# Altium PCB 载板V2.PcbDoc (part 2 of 2)
Units mil, origin at the board's own origin, x right, y up, seen from the top; angles counter-clockwise.
Board outline 2583.5 x 2223.97 mil, 4 copper layers (Top Layer, Mid-Layer 1, Mid-Layer 2, Bottom Layer); 78 components, 78 nets, 323 pads, 130 vias.
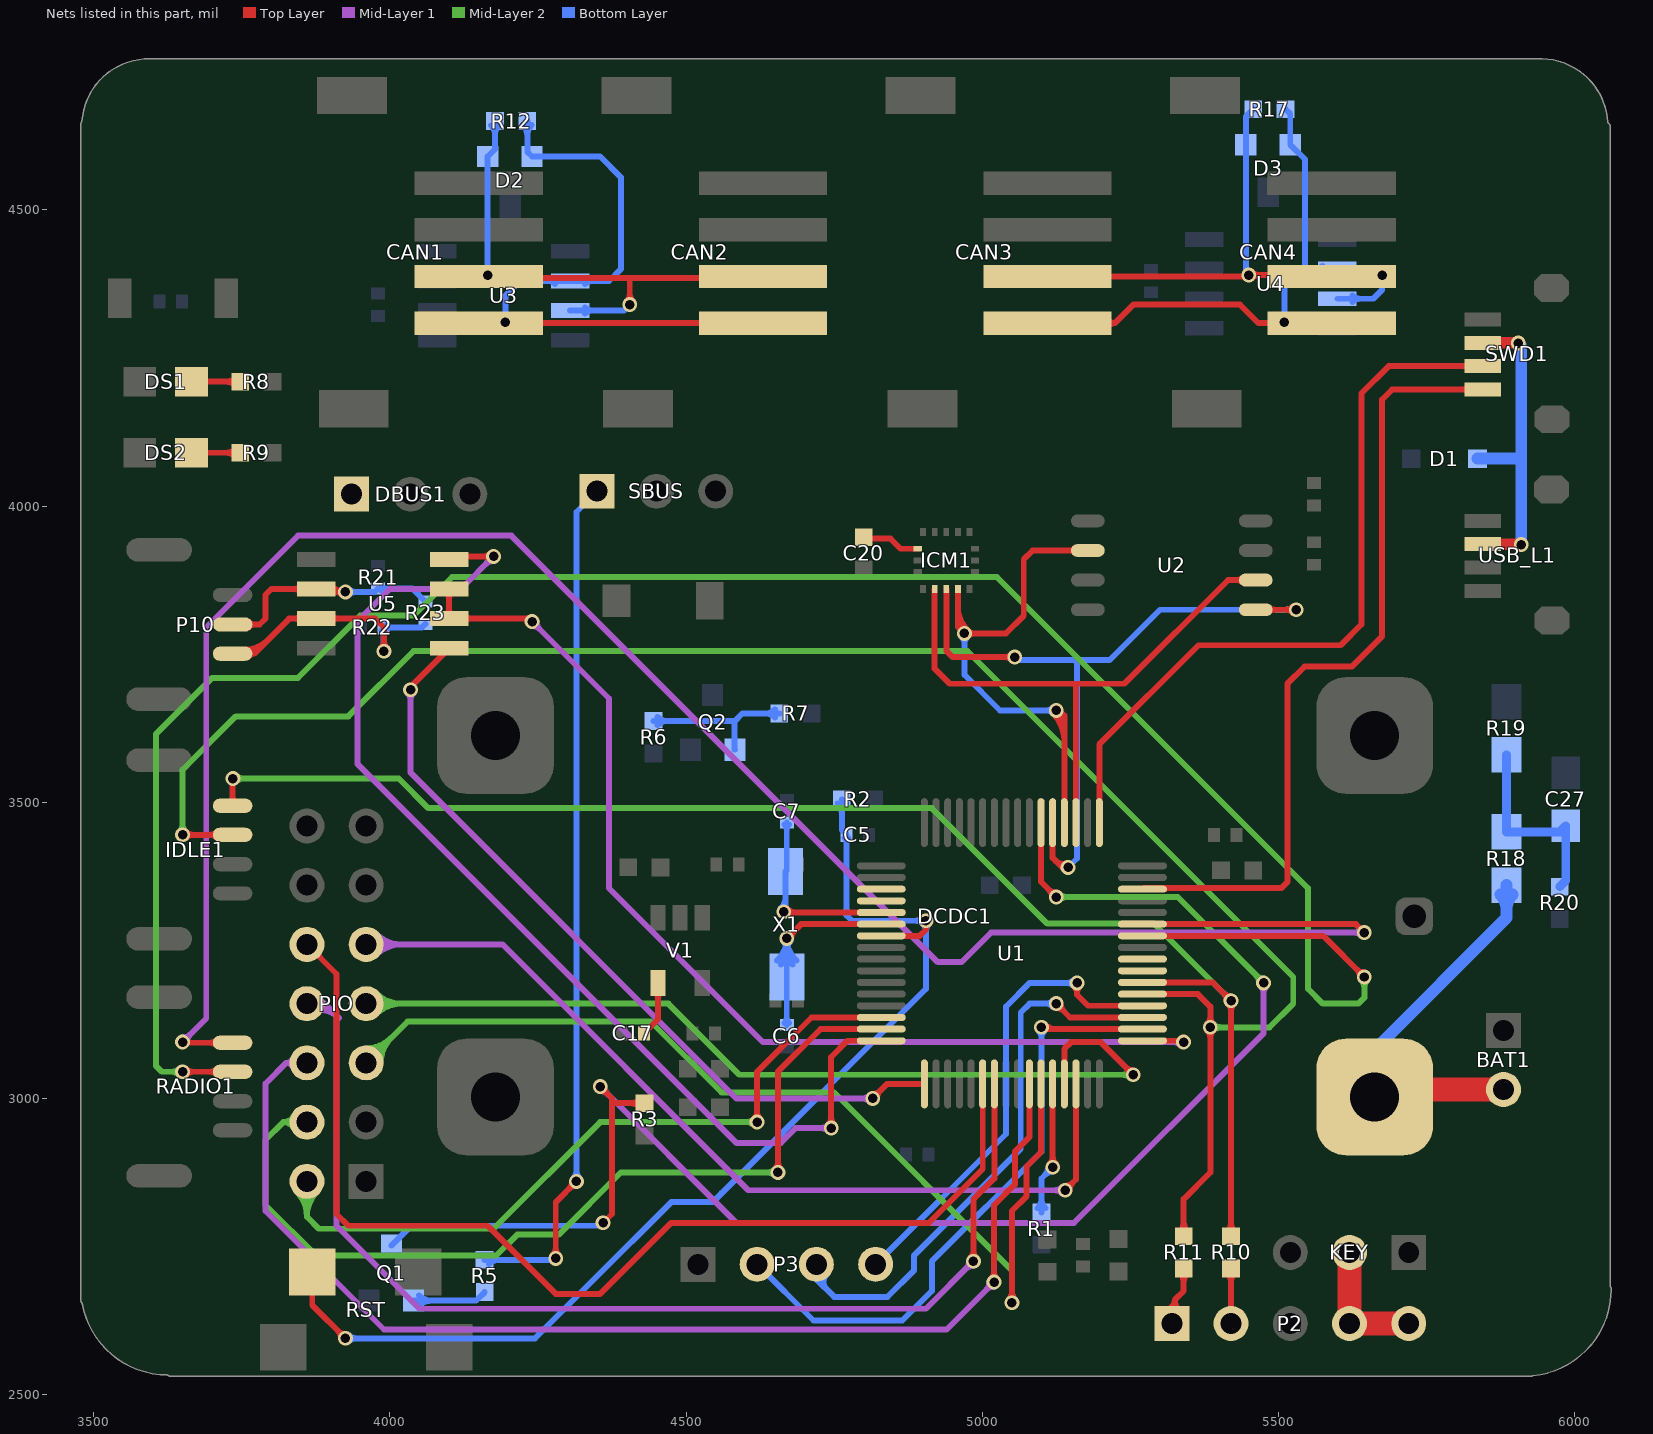
[diagram p4: the nets of this part, all layers, seen from the top]

## Via types
v1: diameter 25, hole 16, Top Layer to Bottom Layer, 124 vias
v2: diameter 244.09, hole 108.27, Top Layer to Bottom Layer, 6 vias

## Nets (pads, with @x,y where several pads share a name; then routed paths per layer and width w, separated by ;. In a path a pad name is that pad's centre, name@x,y a point inside that pad or via, vN(x,y) a via of type N, cw(c..) or ccw(c..) an arc to the next point about the centre after c; other vN are vias at no path point) (continued)
NetC5_2: C5.2 R2.1 RST.1 U1.7 | length 2077.1
  Top Layer w10: RST.1@3869,2707 3869,2651 v1(3925,2595) ; v1@3917.5,2595 ccw(c3899.39,2595) 3912.2,2607.8 ccw(c3925,2620.61) v1@3925,2602.5 ; U1.7@4829.53,3274.53 4894.53,3274.53 4905,3285 v1(4905,3300)
  Bottom Layer w10: v1(3925,2595) 4245,2595 4405,2755 4410,2760 4475,2825 4545,2825 4560,2840 4905,3185 v1(4905,3300) 4780,3300 4771,3309 C5.2@4771,3445 4763,3453 R2.1@4763,3505 ; v1@3930.3,2589.7 cw(c3943.11,2576.89) 3943.11,2595 cw(c3943.11,2613.11) v1@3930.3,2600.3 ; R2.1@4755.93,3497.93 cw(c4738.86,3480.86) 4763,3480.86 cw(c4787.14,3480.86) R2.1@4770.07,3497.93 ; C5.2@4767.46,3439.65 cw(c4758.93,3431.12) 4771,3431.12 cw(c4783.07,3431.12) C5.2@4774.54,3439.65 ; v1@4899.7,3305.3 cw(c4886.89,3318.11) 4886.89,3300 cw(c4886.89,3281.89) 4899.7,3294.7 cw(c4886.89,3281.89) 4905,3281.89 cw(c4923.11,3281.89) v1@4910.3,3294.7
NetC6_2: C6.2 U1.6 X1.1 | length 524
  Top Layer w10: v1(4670,3270) 4694.21,3294.21 U1.6@4829.53,3294.21 ; v1@4670,3277.5 ccw(c4670,3295.61) 4682.8,3282.8 ccw(c4695.61,3270) v1@4677.5,3270
  Bottom Layer w10: X1.1@4653.57,3233.06 ccw(c4620.25,3270) v1(4670,3270) ; X1.1@4660.27,3225.63 ccw(c4640.53,3247.51) 4670,3247.51 ccw(c4699.47,3247.51) X1.1@4679.73,3225.63 ; v1@4664.7,3264.7 cw(c4651.89,3251.89) 4670,3251.89 cw(c4688.11,3251.89) v1@4675.3,3264.7 ; C6.2@4666.46,3127.54 ccw(c4657.93,3136.07) 4670,3136.07 ccw(c4682.07,3136.07) C6.2@4673.54,3127.54 ; C6.2@4670,3124 X1.1@4670,3205 v1(4670,3270) ; X1.1@4686.43,3233.06 cw(c4719.75,3270) v1(4670,3270)
NetC7_2: C7.2 U1.5 X1.2 | length 387.7
  Top Layer w10: v1(4665,3315) 4670,3315 4671.1,3313.9 4686.1,3313.9 4710,3313.9 U1.5@4829.53,3313.9 ; v1@4670.3,3309.7 cw(c4680.45,3299.55) 4680.45,3313.9 ; v1@4670.3,3320.3 ccw(c4685.77,3335.77) 4685.77,3313.9
  Bottom Layer w10: v1@4659.7,3320.3 ccw(c4639.65,3340.35) 4668,3340.35 ; v1(4665,3315) 4668,3318 X1.2@4668,3383 4670,3385 C7.2@4670,3466 ; C7.2@4666.46,3462.46 cw(c4657.93,3453.93) 4670,3453.93 cw(c4682.07,3453.93) C7.2@4673.54,3462.46
NetC17_1: C17.1 V1.4 | length 124.2
  Top Layer w10: C17.1@4429,3110 4452.6,3133.6 V1.4@4452.6,3194.88 ; V1.4@4447.09,3180.51 cw(c4433.78,3167.2) 4452.6,3167.2 cw(c4471.42,3167.2) V1.4@4458.11,3180.51
NetC20_2: C20.2 ICM1.14 | length 99.2
  Top Layer w10: C20.2@4800.06,3947.5 4802.56,3945 4845,3945 4862.09,3927.91 ICM1.14@4891.14,3927.91
NetC27_1: C27.1 R18.1 R19.2 R20.2 | length 340.8
  Bottom Layer w15: R19.2@5885,3580 R18.1@5885,3450 5975,3450 C27.1@5985,3460 5985,3367.56 R20.2@5974.94,3357.5
NetCAN1_3: CAN1.3 CAN2.3 D2.1 R12.2 U3.7 | length 1028.7
  Top Layer w10: CAN1.3@4150,4387.52 4152.52,4385 4410,4385 4627.48,4385 CAN2.3@4630,4387.52 ; CAN1.3@4170.3,4395.3 ccw(c4195.18,4420.18) CAN1.3@4195.18,4385 ; v1@4399.7,4345.3 ccw(c4386.89,4358.11) 4405,4358.11 ccw(c4423.11,4358.11) v1@4410.3,4345.3 ; v1(4405,4340) 4405,4380
  Bottom Layer w10: v1@4159.7,4395.3 ccw(c4146.89,4408.11) 4165,4408.11 ccw(c4183.11,4408.11) v1@4170.3,4395.3 ; v1(4165,4390) D2.1@4165,4590 4177.5,4602.5 R12.2@4177.5,4649.94 ; R12.2@4170.43,4642.86 cw(c4153.36,4625.79) 4177.5,4625.79 cw(c4201.64,4625.79) R12.2@4184.57,4642.86 ; U3.7@4304.41,4330 4395,4330 ; U3.7@4329.71,4324.7 cw(c4342.52,4311.89) 4342.52,4330 cw(c4342.52,4348.11) U3.7@4329.71,4335.3
NetCAN1_4: CAN1.4 CAN2.4 D2.2 R12.1 U3.6 | length 1301.6
  Top Layer w10: CAN1.4@4150,4308.78 CAN2.4@4630,4308.78 ; CAN1.4@4173.95,4308.78 ccw(c4173.95,4331.05) CAN1.4@4189.7,4315.3 ; CAN1.4@4179.84,4308.78 cw(c4179.84,4294.84) CAN1.4@4189.7,4304.7 ; CAN1.4@4200.3,4304.7 cw(c4210.16,4294.84) CAN1.4@4210.16,4308.78 ; CAN1.4@4200.3,4315.3 ccw(c4216.05,4331.05) CAN1.4@4216.05,4308.78
  Bottom Layer w10: v1@4189.7,4315.3 ccw(c4176.89,4328.11) 4195,4328.11 ccw(c4213.11,4328.11) v1@4200.3,4315.3 ; v1(4195,4310) 4195,4355 4220,4380 U3.6@4304.41,4380 4370,4380 4390,4400 4390,4555 4355,4590 D2.2@4240,4590 4232,4598 R12.1@4232,4650 ; R12.1@4224.93,4642.93 cw(c4207.86,4625.86) 4232,4625.86 cw(c4256.14,4625.86) R12.1@4239.07,4642.93 ; U3.6@4279.11,4374.7 ccw(c4266.3,4361.89) 4266.3,4380 ccw(c4266.3,4398.11) U3.6@4279.11,4385.3 ; U3.6@4329.71,4374.7 cw(c4342.52,4361.89) 4342.52,4380 cw(c4342.52,4398.11) U3.6@4329.71,4385.3
NetCAN3_3: CAN3.3 CAN4.3 D3.1 R17.2 U4.7 | length 971.4
  Top Layer w10: CAN3.3@5110,4387.52 5447.52,4387.52 v1(5450,4390) 5587.52,4390 CAN4.3@5590,4387.52 ; v1@5455.3,4384.7 cw(c5468.11,4371.89) 5468.11,4390 cw(c5468.11,4408.11) v1@5455.3,4395.3
  Bottom Layer w10: v1(5450,4390) 5450,4385 5445,4390 D3.1@5445,4610 5445,4657.44 R17.2@5457.5,4669.94 ; U4.7@5599.41,4350 5660,4350 5675,4365 v1(5675,4390) ; U4.7@5624.71,4344.7 cw(c5637.52,4331.89) 5637.52,4350 cw(c5637.52,4368.11) U4.7@5624.71,4355.3 ; v1@5669.7,4384.7 cw(c5656.89,4371.89) 5675,4371.89 cw(c5693.11,4371.89) v1@5680.3,4384.7
NetCAN3_4: CAN3.4 CAN4.4 D3.2 R17.1 U4.6 | length 1098.2
  Top Layer w10: CAN3.4@5110,4308.78 5223.78,4308.78 ; CAN3.4@5211.36,4301.54 cw(c5223.78,4294.51) 5223.78,4308.78 ; CAN3.4@5211.36,4316.02 ccw(c5223.78,4323.05) 5223.78,4308.78 ; CAN4.4@5488.95,4308.78 ccw(c5488.95,4331.05) CAN4.4@5504.7,4315.3 ; CAN4.4@5494.84,4308.78 cw(c5494.84,4294.84) CAN4.4@5504.7,4304.7 ; CAN4.4@5515.3,4304.7 cw(c5525.16,4294.84) CAN4.4@5525.16,4308.78 ; CAN4.4@5515.3,4315.3 ccw(c5531.05,4331.05) CAN4.4@5531.05,4308.78 ; CAN4.4@5590,4308.78 5466.22,4308.78 5435,4340 5255,4340 5223.78,4308.78
  Bottom Layer w10: v1@5504.7,4315.3 ccw(c5491.89,4328.11) 5510,4328.11 ccw(c5528.11,4328.11) v1@5515.3,4315.3 ; v1(5510,4310) 5510,4375 5535,4400 5545,4400 ; R17.1@5512,4670 5520,4662 D3.2@5520,4610 5545,4585 5545,4400 ; U4.6@5574.11,4394.7 ccw(c5561.3,4381.89) 5561.3,4400 ccw(c5561.3,4418.11) U4.6@5574.11,4405.3 ; U4.6@5599.41,4400 5545,4400
NetD1_1: D1.1 SWD1.2 USB_L1.2 | length 559.7
  Top Layer w20: USB_L1.2@5845,3935.63 5909.37,3935.63 v1(5910,3935) ; SWD1.2@5845,4275.63 5904.37,4275.63 v1(5905,4275)
  Bottom Layer w20: D1.1@5836,4080 5910,4080 ; v1@5903.23,4273.23 cw(c5886.89,4256.89) 5910,4256.89 ; v1(5905,4275) 5910,4270 5910,4080 ; v1(5910,3935) 5910,4080
NetDS1_1: DS1.1 R8.2 | length 120.5
  Top Layer w10: DS1.1@3665,4210 R8.2@3747.53,4210 ; R8.2@3740.46,4202.93 ccw(c3723.39,4185.86) 3723.39,4210 ccw(c3723.39,4234.14) R8.2@3740.46,4217.07
NetDS2_1: DS2.1 R9.2 | length 120.5
  Top Layer w10: DS2.1@3665,4090 R9.2@3747.53,4090 ; R9.2@3740.46,4082.93 ccw(c3723.39,4065.86) 3723.39,4090 ccw(c3723.39,4114.14) R9.2@3740.46,4097.07
NetKEY_2: KEY.2 P2.4 P2.5 | length 220
  Top Layer w40: KEY.2@5620,2740 P2.4@5620,2620 P2.5@5720,2620
NetP2_1: P2.1 R11.1 | length 185
  Top Layer w10: P2.1@5312.78,2643.44 ccw(c5307.67,2660) 5325,2660 ; P2.1@5320,2620 5325,2625 5325,2660 ; R11.1@5332.93,2705.93 cw(c5315.86,2688.86) 5340,2688.86 cw(c5364.14,2688.86) R11.1@5347.07,2705.93 ; P2.1@5335.09,2639.34 cw(c5351.2,2660) 5325,2660 ; R11.1@5340,2713 5340,2675 5325,2660
NetP2_2: P2.2 R10.1 | length 130.9
  Top Layer w10: R10.1@5412.93,2705.93 cw(c5395.86,2688.86) 5420,2688.86 cw(c5444.14,2688.86) R10.1@5427.07,2705.93 ; P2.2@5420,2620 R10.1@5420,2713
NetP10_1: P10.1 R22.2 R23.1 U5.7 | length 648
  Top Layer w10: P10.1@3734.57,3750.79 3770.79,3750.79 ; P10.1@3756.07,3747.79 ccw(c3756.07,3776.08) 3776.08,3756.08 ; P10.1@3756.07,3757.79 ccw(c3756.07,3810.23) 3793.15,3773.15 ; P10.1@3761.5,3746.37 cw(c3770.79,3738.81) 3770.79,3750.79 ; P10.1@3761.5,3755.21 ccw(c3770.79,3762.76) 3770.79,3750.79 ; U5.7@3850.29,3804.7 ccw(c3837.48,3791.89) 3837.48,3810 ccw(c3837.48,3828.11) U5.7@3850.29,3815.3 ; U5.7@3900.89,3804.7 cw(c3913.7,3791.89) 3913.7,3810 cw(c3913.7,3828.11) U5.7@3900.89,3815.3 ; v1@3984.7,3760.3 ccw(c3971.89,3773.11) 3990,3773.11 ccw(c4008.11,3773.11) v1@3995.3,3760.3 ; v1(3990,3755) 3990,3795 3975,3810 3920,3810 U5.7@3875.59,3810 3830,3810 3770.79,3750.79
  Bottom Layer w10: R22.2@3985.46,3789.65 cw(c3976.93,3781.12) 3989,3781.12 cw(c4001.07,3781.12) R22.2@3992.54,3789.65 ; v1(3990,3755) 3989,3756 R22.2@3989,3795 4054,3795 R23.1@4060,3801 ; R22.2@3992.54,3791.46 cw(c4001.07,3782.93) 4001.07,3795 cw(c4001.07,3807.07) R22.2@3992.54,3798.54
NetP10_2: P10.2 R21.1 R23.2 U5.6 | length 579.5
  Top Layer w10: P10.2@3734.57,3800 3780,3800 3790,3810 3790,3850 3800,3860 U5.6@3855.59,3860 ; P10.2@3761.02,3795.05 cw(c3772.97,3783.1) 3772.97,3800 cw(c3772.97,3816.9) P10.2@3761.02,3804.95 ; U5.6@3850.29,3854.7 ccw(c3837.48,3841.89) 3837.48,3860 ccw(c3837.48,3878.11) U5.6@3850.29,3865.3 ; U5.6@3875.59,3860 3880.59,3855 v1(3925,3855) cw(c3925,3888.34) U5.6@3900.99,3865.2 ; v1@3919.7,3849.7 ccw(c3906.89,3836.89) 3906.89,3855 ccw(c3906.89,3873.11) v1@3919.7,3860.3
  Bottom Layer w10: 3951,3855 v1(3925,3855) 3974,3855 R21.1@3980,3861 4038,3861 R23.2@4060,3839 ; R21.1@3985.35,3857.46 cw(c3993.88,3848.93) 3993.88,3861 cw(c3993.88,3873.07) R21.1@3985.35,3864.54 ; 3943.11,3855 ccw(c3943.11,3836.89) 3930.3,3849.7 cw(c3943.11,3836.89) 3943.11,3855 ; 3943.11,3855 cw(c3943.11,3873.11) 3930.3,3860.3 ccw(c3943.11,3873.11) 3943.11,3855
NetQ1_2: Q1.2 R5.1 | length 174.2
  Bottom Layer w10: Q1.2@4039.91,2658.74 4145.74,2658.74 R5.1@4160,2673 ; Q1.2@4048.9,2649.75 cw(c4070.61,2628.04) 4070.61,2658.74 cw(c4070.61,2689.44) Q1.2@4048.9,2667.73
NetQ2_2: Q2.2 R6.1 R7.2 | length 342.1
  Bottom Layer w10: R6.1@4445.06,3637 4582,3637 ; R6.1@4452.14,3629.93 cw(c4469.21,3612.86) 4469.21,3637 cw(c4469.21,3661.14) R6.1@4452.14,3644.07 ; Q2.2@4582.4,3588.74 4582,3589.14 4582,3637 ; R7.2@4650.43,3642.86 ccw(c4633.36,3625.79) 4633.36,3649.94 ccw(c4633.36,3674.08) R7.2@4650.43,3657.01 ; R7.2@4657.5,3649.94 4594.94,3649.94 4582,3637
NetR1_2: R1.2 U1.28 | length 405.2
  Top Layer w10: v1@5113.59,2889.2 ccw(c5100.79,2902) 5118.9,2902 ccw(c5137,2902) v1@5124.2,2889.2 ; v1(5118.9,2883.9) U1.28@5118.9,3024.53
  Bottom Layer w10: 5099.94,2855.06 R1.2@5099.94,2807.5 5099.94,2864.94 v1(5118.9,2883.9) ; v1@5111.4,2883.9 cw(c5093.29,2883.9) 5106.09,2871.09 cw(c5118.9,2858.29) v1@5118.9,2876.4 ; 5099.94,2831.64 ccw(c5124.08,2831.64) 5107.01,2814.57 cw(c5124.08,2831.64) 5099.94,2831.64 ; 5099.94,2831.64 cw(c5075.79,2831.64) 5092.86,2814.57 ccw(c5075.79,2831.64) 5099.94,2831.64
NetR5_2: R5.2 SBUS.1 | length 1568.3
  Top Layer w10: v1@4274.7,2735.3 ccw(c4261.89,2748.11) 4280,2748.11 ccw(c4298.11,2748.11) v1@4285.3,2735.3 ; v1(4280,2730) 4280,2825 v1(4315,2860) ; v1@4307.5,2860 cw(c4289.39,2860) 4302.2,2847.2 cw(c4315,2834.39) v1@4315,2852.5
  Bottom Layer w10: R5.2@4159.94,2727.5 4277.5,2727.5 v1(4280,2730) ; R5.2@4167.01,2720.43 cw(c4184.08,2703.36) 4184.08,2727.5 cw(c4184.08,2751.64) R5.2@4167.01,2734.57 ; v1@4309.7,2865.3 ccw(c4296.89,2878.11) 4315,2878.11 ccw(c4333.11,2878.11) v1@4320.3,2865.3 ; v1(4315,2860) 4315,3990 SBUS.1@4350,4025
POWER: BAT1.2 DCDC1.1 R18.2 | length 729.3
  Top Layer w40: DCDC1.1@5662.57,3002.34 5675.24,3015 5805,3015 BAT1.2@5880,3015
  Bottom Layer w20: DCDC1.1@5662.57,3002.34 5662.57,3082.57 5885,3305 R18.2@5885,3360 ; R18.2@5874.39,3344.39 cw(c5848.79,3318.79) 5885,3318.79 cw(c5921.21,3318.79) R18.2@5895.61,3344.39
PWM1: PIO.2 U1.14 | length 1440.4
  Top Layer w10: v1@4614.7,2965.3 ccw(c4601.89,2978.11) 4620,2978.11 ccw(c4638.11,2978.11) v1@4625.3,2965.3 ; v1(4620,2960) 4620,3045 4711.73,3136.73 U1.14@4829.53,3136.73
  Mid-Layer 2 w10: PIO.2@3842.66,2842.66 cw(c3800.79,2800.79) 3860,2800.79 cw(c3919.21,2800.79) PIO.2@3877.34,2842.66 ; PIO.2@3849.73,2849.73 cw(c3824.93,2824.93) 3860,2824.93 cw(c3895.07,2824.93) PIO.2@3870.27,2849.73 ; PIO.2@3860,2860 3860,2800 3880,2780 4175,2780 4355,2960 4590,2960 v1(4620,2960) ; v1@4614.7,2954.7 ccw(c4601.89,2941.89) 4601.89,2960 ccw(c4601.89,2978.11) v1@4614.7,2965.3
PWM2: PIO.4 U1.15 | length 1626.7
  Top Layer w10: v1@4649.7,2880.3 ccw(c4636.89,2893.11) 4655,2893.11 ccw(c4673.11,2893.11) v1@4660.3,2880.3 ; v1(4655,2875) 4655,3045 4727.05,3117.05 U1.15@4829.53,3117.05
  Mid-Layer 2 w10: PIO.4@3838.14,2948.88 ccw(c3820,2939.65) 3820,2960 ; PIO.4@3838.14,2971.12 cw(c3820,2980.35) 3820,2960 ; PIO.4@3860,2960 3820,2960 ; v1@4649.7,2869.7 ccw(c4636.89,2856.89) 4636.89,2875 ccw(c4636.89,2893.11) v1@4649.7,2880.3 ; v1(4655,2875) 4390,2875 4285,2770 4215,2770 4180,2735 3875,2735 3790,2820 3790,2930 3820,2960
PWM7: PIO.6 U1.26 | length 2092.6
  Top Layer w10: v1@5014.7,2695.3 ccw(c5001.89,2708.11) 5020,2708.11 ccw(c5038.11,2708.11) v1@5025.3,2695.3 ; v1(5020,2690) 5020,2820 5055,2855 5055,2910 5079.53,2934.53 U1.26@5079.53,3024.53
  Mid-Layer 1 w10: PIO.6@3836.94,3051.63 ccw(c3825,3047.29) 3825,3060 ; PIO.6@3836.94,3068.37 cw(c3825,3072.71) 3825,3060 ; PIO.6@3860,3060 3825,3060 ; v1@5012.5,2690 cw(c4994.39,2690) 5007.2,2677.2 cw(c5020,2664.39) v1@5020,2682.5 ; v1(5020,2690) 4940,2610 3990,2610 3790,2810 3790,3025 3825,3060
PWM8: PIO.5 U1.27 | length 1942.9
  Top Layer w10: v1@5044.7,2660.3 ccw(c5031.89,2673.11) 5050,2673.11 ccw(c5068.11,2673.11) v1@5055.3,2660.3 ; v1(5050,2655) 5050,2810 5075,2835 5075,2885 5099.21,2909.21 U1.27@5099.21,3024.53
  Mid-Layer 2 w10: PIO.5@3960,3060 4030,3130 4440,3130 4560,3010 4750,3010 5050,2710 v1(5050,2655) ; PIO.5@3960,3074.53 ccw(c3960,3109.6) 3984.8,3084.8 ccw(c4009.6,3060) PIO.5@3974.53,3060 ; PIO.5@3960,3084.53 ccw(c3960,3143.74) 4001.87,3101.87 ccw(c4043.74,3060) PIO.5@3984.53,3060 ; v1@5044.7,2660.3 ccw(c5031.89,2673.11) 5050,2673.11 ccw(c5068.11,2673.11) v1@5055.3,2660.3
PWM11: U1.39
PWM12: U1.40
RX485: U1.16 U5.4 | length 1997.7
  Top Layer w10: U5.4@4100,3910 4105,3915 v1(4175,3915) ; v1@4169.7,3909.7 ccw(c4156.89,3896.89) 4156.89,3915 ccw(c4156.89,3933.11) v1@4169.7,3920.3 ; v1@4739.7,2955.3 ccw(c4726.89,2968.11) 4745,2968.11 ccw(c4763.11,2968.11) v1@4750.3,2955.3 ; v1(4745,2950) 4745,3070 4772.36,3097.36 U1.16@4829.53,3097.36
  Mid-Layer 1 w10: v1@4167.5,3915 cw(c4149.39,3915) 4162.2,3902.2 cw(c4175,3889.39) v1@4175,3907.5 ; v1(4175,3915) 4120,3860 4000,3860 3945,3805 3945,3565 4585,2925 4660,2925 4685,2950 v1(4745,2950) ; v1@4739.7,2944.7 ccw(c4726.89,2931.89) 4726.89,2950 ccw(c4726.89,2968.11) v1@4739.7,2955.3
SBUS: Q1.3 R3.1 U1.54 | length 2856.4
  Top Layer w10: v1@4355,3012.5 cw(c4355,2994.39) 4367.8,3007.2 cw(c4380.61,3020) v1@4362.5,3020 ; v1(4355,3020) 4375,3000 4375,2992 ; v1(4360,2790) 4375,2805 4375,2990 ; R3.1@4422.93,2984.93 ccw(c4405.86,2967.86) 4405.86,2992 ccw(c4405.86,3016.14) R3.1@4422.93,2999.07 ; R3.1@4430,2992 4377,2992 ; U1.54@5099.21,3465.47 5099.21,3365.79 v1(5125,3340) ; v1@5117.5,3340 ccw(c5099.39,3340) 5112.2,3352.8 ccw(c5125,3365.61) v1@5125,3347.5 ; 4375,2990 4375,2992 ; 4375,2990 4377,2992 ; 4375,2992 4377,2992
  Mid-Layer 1 w10: v1@4355,3012.5 cw(c4355,2994.39) 4367.8,3007.2 cw(c4380.61,3020) v1@4362.5,3020 ; v1(4355,3020) 4585,2790 5155,2790 5475,3110 v1(5475,3195) ; v1@5469.7,3189.7 cw(c5456.89,3176.89) 5475,3176.89 cw(c5493.11,3176.89) v1@5480.3,3189.7
  Mid-Layer 2 w10: v1(5125,3340) 5330,3340 v1(5475,3195) ; v1@5130.3,3334.7 cw(c5143.11,3321.89) 5143.11,3340 cw(c5143.11,3358.11) v1@5130.3,3345.3 ; v1@5467.5,3195 ccw(c5449.39,3195) 5462.2,3207.8 ccw(c5475,3220.61) v1@5475,3202.5
  Bottom Layer w10: Q1.3@4002.5,2751.26 4036.24,2785 v1@4355,2785
SCL_B: U1.3
SCL_P: PIO.10 U1.22 | length 1853.5
  Top Layer w10: PIO.10@3860,3260 3910,3210 3910,2805 3930,2785 4165,2785 4280,2670 4355,2670 4475,2790 4910,2790 5000.79,2880.79 U1.22@5000.79,3024.53
SCLK_FC: SWD1.3 U1.49 | length 1298.3
  Top Layer w10: U1.49@5197.64,3465.47 5197.64,3597.64 5365,3765 5605,3765 5640,3800 5640,4190 5686.26,4236.26 SWD1.3@5845,4236.26 ; SWD1.3@5821.48,4231.44 ccw(c5809.86,4219.82) 5809.86,4236.26 ccw(c5809.86,4252.7) SWD1.3@5821.48,4241.08
SDA_B: U1.4
SDA_P: PIO.8 U1.23 | length 2085.2
  Top Layer w10: v1@4979.7,2730.3 ccw(c4966.89,2743.11) 4985,2743.11 ccw(c5003.11,2743.11) v1@4990.3,2730.3 ; v1(4985,2725) 4985,2829.53 5020.47,2865 U1.23@5020.47,3024.53
  Mid-Layer 1 w10: PIO.8@3858.06,3165.12 cw(c3869.47,3135.06) 3892.21,3157.79 ; PIO.8@3860,3160 3890,3160 3910,3140 3910,2785 4050,2645 4905,2645 v1(4985,2725) ; PIO.8@3861.61,3155.77 cw(c3875.49,3119.22) 3903.14,3146.86 ; PIO.8@3865.16,3146.42 cw(c3881.51,3103.37) 3914.07,3135.93 ; v1@4977.5,2725 cw(c4959.39,2725) 4972.2,2712.2 cw(c4985,2699.39) v1@4985,2717.5
SPI2_CK: P3.2 U1.34 | length 1103.6
  Top Layer w10: v1(5100,3120) 5100,3115 5102.05,3117.05 U1.34@5270.47,3117.05 ; v1@5105.3,3125.3 ccw(c5125.24,3145.24) 5125.24,3117.05
  Bottom Layer w10: P3.2@4620,2720 4715,2625 4865,2625 4915,2675 4915,2725 5100,2910 v1(5100,3120) ; v1@5094.7,3114.7 cw(c5081.89,3101.89) 5100,3101.89 cw(c5118.11,3101.89) v1@5105.3,3114.7
SPI2_SI: P3.4 U1.36 | length 857.7
  Top Layer w10: v1@5154.7,3189.7 cw(c5141.89,3176.89) 5160,3176.89 cw(c5178.11,3176.89) v1@5165.3,3189.7 ; v1(5160,3195) 5160,3175 5178.58,3156.42 U1.36@5270.47,3156.42
  Bottom Layer w10: P3.4@4820,2720 5040,2940 5040,3155 5080,3195 v1(5160,3195) ; v1@5154.7,3189.7 ccw(c5141.89,3176.89) 5141.89,3195 ccw(c5141.89,3213.11) v1@5154.7,3200.3
SPI2_SO: P3.3 U1.35 | length 1064.8
  Top Layer w10: v1@5125,3152.5 cw(c5125,3134.39) 5137.8,3147.2 cw(c5150.61,3160) v1@5132.5,3160 ; v1(5125,3160) 5148.27,3136.73 U1.35@5270.47,3136.73
  Bottom Layer w10: P3.3@4720,2720 4720,2695 4750,2665 4840,2665 4885,2710 4885,2735 5065,2915 5065,3095 5065,3145 5080,3160 v1(5125,3160) ; P3.3@4730.33,2709.78 ccw(c4743.01,2697.23) 4730.39,2684.61 ; P3.3@4737.43,2702.75 ccw(c4750.16,2690.16) 4737.5,2677.5 ; v1@5119.7,3154.7 ccw(c5106.89,3141.89) 5106.89,3160 ccw(c5106.89,3178.11) v1@5119.7,3165.3
SPI3_CK: ICM1.2 U1.51 U2.6 | length 1017
  Top Layer w10: ICM1.2@4919.69,3860 4919.69,3725.32 4945,3700 5160,3700 ; U1.51@5158.27,3465.47 5158.27,3698.27 5160,3700 ; U2.6@5439.9,3870.88 ccw(c5429.95,3860.93) 5429.95,3875 ccw(c5429.95,3889.07) U2.6@5439.9,3879.12 ; U2.6@5461.73,3875 5415,3875 5240,3700 5160,3700
SPI3_SI: ICM1.3 U1.53 U2.5 | length 1385.7
  Top Layer w10: ICM1.3@4939.37,3860 4939.37,3755.63 4950,3745 v1(5055,3745) ; v1@5049.7,3739.7 ccw(c5036.89,3726.89) 5036.89,3745 ccw(c5036.89,3763.11) v1@5049.7,3750.3 ; U1.53@5118.9,3465.47 5118.9,3406.1 5135,3390 v1(5145,3390) ; 5123.9,3401.1 ccw(c5136.33,3413.53) v1@5142.41,3397.04 ; U2.5@5461.73,3825 v1(5530,3825) ; U2.5@5483.57,3820.88 cw(c5493.52,3810.93) 5493.52,3825 cw(c5493.52,3839.07) U2.5@5483.57,3829.12 ; v1@5524.7,3819.7 ccw(c5511.89,3806.89) 5511.89,3825 ccw(c5511.89,3843.11) v1@5524.7,3830.3
  Bottom Layer w10: v1(5055,3745) 5055,3740 5155,3740 ; v1(5145,3390) 5160,3405 5160,3735 5155,3740 ; v1@5524.7,3819.7 ccw(c5511.89,3806.89) 5511.89,3825 ccw(c5511.89,3843.11) v1@5524.7,3830.3 ; v1(5530,3825) 5300,3825 5215,3740 5155,3740
SPI3_SO: ICM1.4 U1.52 U2.2 | length 1114.4
  Top Layer w10: 4959.06,3805.39 ccw(c4990.39,3805.39) v1@4968.23,3783.23 ; 4959.06,3829.53 ccw(c5014.53,3829.53) 4975.3,3790.3 ccw(c4988.11,3803.11) 4988.11,3785 ccw(c4988.11,3766.89) v1@4975.3,3779.7 ; ICM1.4@4959.06,3860 4959.06,3795.95 v1(4970,3785) 5040,3785 5070,3815 5070,3910 5085,3925 U2.2@5178.27,3925 ; v1@5119.7,3649.7 cw(c5074.1,3604.1) 5138.58,3604.1 ; v1(5125,3655) 5125,3660 5138.58,3646.42 U1.52@5138.58,3465.47 ; v1@5126.77,3656.77 cw(c5098.24,3628.24) 5138.58,3628.24 ; U2.2@5156.43,3920.88 ccw(c5146.48,3910.93) 5146.48,3925 ccw(c5146.48,3939.07) U2.2@5156.43,3929.12
  Bottom Layer w10: v1@4964.7,3779.7 cw(c4951.89,3766.89) 4970,3766.89 cw(c4988.11,3766.89) v1@4975.3,3779.7 ; v1(4970,3785) 4970,3715 5030,3655 v1(5125,3655) ; v1@5119.7,3649.7 ccw(c5106.89,3636.89) 5106.89,3655 ccw(c5106.89,3673.11) v1@5119.7,3660.3
SWD_FC: SWD1.4 U1.46 | length 1386.7
  Top Layer w10: U1.46@5270.47,3353.27 5272.2,3355 5505,3355 5515,3365 5515,3700 5544,3729 5624,3729 5675,3780 5675,4180 5691.89,4196.89 SWD1.4@5845,4196.89 ; U1.46@5306.55,3352.63 cw(c5312.27,3346.9) 5312.27,3355 ; SWD1.4@5821.48,4192.07 ccw(c5809.86,4180.45) 5809.86,4196.89 ccw(c5809.86,4213.33) SWD1.4@5821.48,4201.71
TX485: U1.17 U5.1 | length 1427.6
  Top Layer w10: v1(4035,3690) 4035,3695 U5.1@4100,3760 ; v1(4815,3000) 4839.53,3024.53 U1.17@4902.36,3024.53 ; v1@4815,3007.5 ccw(c4815,3025.61) 4827.8,3012.8 ccw(c4840.61,3000) v1@4822.5,3000
  Mid-Layer 1 w10: v1@4029.7,3684.7 cw(c4016.89,3671.89) 4035,3671.89 cw(c4053.11,3671.89) v1@4040.3,3684.7 ; v1(4035,3690) 4035,3550 4585,3000 v1(4815,3000) ; v1@4809.7,2994.7 ccw(c4796.89,2981.89) 4796.89,3000 ccw(c4796.89,3018.11) v1@4809.7,3005.3
TX485_RE: U1.33 U5.2 U5.3 | length 1986.3
  Top Layer w10: U5.2@4094.7,3815.3 ccw(c4081.89,3828.11) 4100,3828.11 ccw(c4118.11,3828.11) U5.2@4105.3,3815.3 ; U5.3@4094.7,3854.7 cw(c4081.89,3841.89) 4100,3841.89 cw(c4118.11,3841.89) U5.3@4105.3,3854.7 ; U5.3@4100,3860 U5.2@4100,3810 4235,3810 v1(4240,3805) ; U5.2@4125.3,3804.7 cw(c4138.11,3791.89) 4138.11,3810 cw(c4138.11,3828.11) U5.2@4125.3,3815.3 ; U1.33@5270.47,3097.36 5337.64,3097.36 v1(5340,3095)
  Mid-Layer 1 w10: v1@4240,3797.5 cw(c4240,3779.39) 4252.8,3792.2 cw(c4265.61,3805) v1@4247.5,3805 ; v1(4240,3805) 4370,3675 4370,3355 4630,3095 v1(5340,3095) ; v1@5334.7,3089.7 ccw(c5321.89,3076.89) 5321.89,3095 ccw(c5321.89,3113.11) v1@5334.7,3100.3
UART1_R_1: RADIO1.4 U1.43 | length 3603.5
  Top Layer w10: v1(3650,3095) 3651,3094 RADIO1.4@3734.57,3094 ; RADIO1.4@3708.12,3089.05 ccw(c3696.17,3077.1) 3696.17,3094 ccw(c3696.17,3110.9) RADIO1.4@3708.12,3098.95 ; U1.43@5270.47,3294.21 5630.79,3294.21 v1(5645,3280)
  Mid-Layer 1 w10: v1(3650,3095) 3690,3135 3690,3795 3845,3950 4180,3950 4205,3950 4925,3230 4965,3230 5015,3280 v1(5645,3280) ; v1@3650,3102.5 ccw(c3650,3120.61) 3662.8,3107.8 ccw(c3675.61,3095) v1@3657.5,3095 ; v1@5639.7,3274.7 ccw(c5626.89,3261.89) 5626.89,3280 ccw(c5626.89,3298.11) v1@5639.7,3285.3
UART1_T_1: RADIO1.3 U1.42 | length 3824.1
  Top Layer w10: v1(3650,3045) RADIO1.3@3734.57,3045 ; v1@3655.3,3039.7 cw(c3668.11,3026.89) 3668.11,3045 cw(c3668.11,3063.11) v1@3655.3,3050.3 ; RADIO1.3@3708.12,3040.05 ccw(c3696.17,3028.1) 3696.17,3045 ccw(c3696.17,3061.9) RADIO1.3@3708.12,3049.95 ; U1.42@5270.47,3274.53 5575.47,3274.53 v1(5645,3205) ; v1@5637.5,3205 ccw(c5619.39,3205) 5632.2,3217.8 ccw(c5645,3230.61) v1@5645,3212.5
  Mid-Layer 2 w10: v1@3644.7,3039.7 ccw(c3631.89,3026.89) 3631.89,3045 ccw(c3631.89,3063.11) v1@3644.7,3050.3 ; v1(3650,3045) 3615,3045 3605,3055 3605,3615 3700,3710 3845,3710 3950,3815 4040,3815 4105,3880 5025,3880 5550,3355 5550,3185 5575,3160 5635,3160 5645,3170 v1(5645,3205) ; v1@5639.7,3199.7 cw(c5626.89,3186.89) 5645,3186.89 cw(c5663.11,3186.89) v1@5650.3,3199.7
UART2_T_1: DBUS1.1
UART3_R_1: PIO.9 U1.30 | length 1744
  Top Layer w10: v1(5140,2845) 5158.27,2863.27 U1.30@5158.27,3024.53 ; v1@5140,2852.5 ccw(c5140,2870.61) 5152.8,2857.8 ccw(c5165.61,2845) v1@5147.5,2845
  Mid-Layer 1 w10: PIO.9@3960,3260 4190,3260 4605,2845 v1(5140,2845) ; PIO.9@3970.27,3249.73 cw(c3995.07,3224.93) 3995.07,3260 cw(c3995.07,3295.07) PIO.9@3970.27,3270.27 ; PIO.9@3977.34,3242.66 cw(c4019.21,3200.79) 4019.21,3260 cw(c4019.21,3319.21) PIO.9@3977.34,3277.34 ; v1@5134.7,2839.7 ccw(c5121.89,2826.89) 5121.89,2845 ccw(c5121.89,2863.11) v1@5134.7,2850.3
UART3_T_1: PIO.7 U1.29 | length 1752.7
  Top Layer w10: U1.29@5138.58,3024.53 5138.58,3083.58 5150,3095 5200,3095 v1(5255,3040) ; v1@5247.5,3040 ccw(c5229.39,3040) 5242.2,3052.8 ccw(c5255,3065.61) v1@5255,3047.5
  Mid-Layer 2 w10: PIO.7@3960,3160 4470,3160 4590,3040 5190,3040 v1(5255,3040) ; PIO.7@3970.27,3149.73 cw(c3995.07,3124.93) 3995.07,3160 cw(c3995.07,3195.07) PIO.7@3970.27,3170.27 ; PIO.7@3977.34,3142.66 cw(c4019.21,3100.79) 4019.21,3160 cw(c4019.21,3219.21) PIO.7@3977.34,3177.34 ; v1@5249.7,3034.7 ccw(c5236.89,3021.89) 5236.89,3040 ccw(c5236.89,3058.11) v1@5249.7,3045.3
UART6_R_1: IDLE1.4 R10.2 U1.38 | length 2624.6
  Top Layer w10: IDLE1.4@3729.62,3498.95 ccw(c3717.67,3510.9) 3734.57,3510.9 ccw(c3751.47,3510.9) IDLE1.4@3739.52,3498.95 ; IDLE1.4@3734.57,3494 3734.57,3539.57 v1(3735,3540) ; U1.38@5270.47,3195.79 5389.21,3195.79 v1(5420.06,3164.94) R10.2@5420.06,2767.5 ; v1@5412.56,3164.94 ccw(c5394.46,3164.94) 5407.26,3177.74 ccw(c5420.06,3190.54) v1@5420.06,3172.44 ; R10.2@5412.99,2774.57 ccw(c5395.92,2791.64) 5420.06,2791.64 ccw(c5444.21,2791.64) R10.2@5427.14,2774.57 ; v1@5414.76,3159.63 cw(c5401.96,3146.83) 5420.06,3146.83 cw(c5438.17,3146.83) v1@5425.37,3159.63
  Mid-Layer 2 w10: v1(3735,3540) 4015,3540 4065,3490 4915,3490 5110,3295 5290,3295 v1(5420.06,3164.94) ; v1@3740.3,3534.7 cw(c3753.11,3521.89) 3753.11,3540 cw(c3753.11,3558.11) v1@3740.3,3545.3 ; v1@5412.56,3164.94 ccw(c5394.46,3164.94) 5407.26,3177.74 ccw(c5420.06,3190.54) v1@5420.06,3172.44
UART6_T_1: IDLE1.3 R11.2 U1.37 | length 3317.9
  Top Layer w10: v1(3650,3445) IDLE1.3@3734.57,3445 ; v1@3655.3,3439.7 cw(c3668.11,3426.89) 3668.11,3445 cw(c3668.11,3463.11) v1@3655.3,3450.3 ; IDLE1.3@3708.12,3440.05 ccw(c3696.17,3428.1) 3696.17,3445 ccw(c3696.17,3461.9) IDLE1.3@3708.12,3449.95 ; U1.37@5270.47,3176.1 5363.9,3176.1 5385,3155 v1(5385,3120) 5385,2875 5340.06,2830.06 R11.2@5340.06,2767.5 ; R11.2@5332.99,2774.57 ccw(c5315.92,2791.64) 5340.06,2791.64 ccw(c5364.21,2791.64) R11.2@5347.14,2774.57 ; v1@5379.7,3114.7 cw(c5366.89,3101.89) 5385,3101.89 cw(c5403.11,3101.89) v1@5390.3,3114.7 ; v1@5379.7,3125.3 ccw(c5366.89,3138.11) 5385,3138.11 ccw(c5403.11,3138.11) v1@5390.3,3125.3
  Mid-Layer 2 w10: v1@3644.7,3450.3 ccw(c3631.89,3463.11) 3650,3463.11 ccw(c3668.11,3463.11) v1@3655.3,3450.3 ; v1(3650,3445) 3650,3555 3740,3645 3930,3645 4040,3755 4975,3755 5525,3205 5525,3160 5485,3120 v1(5385,3120) ; v1@5390.3,3114.7 cw(c5403.11,3101.89) 5403.11,3120 cw(c5403.11,3138.11) v1@5390.3,3125.3
pads on no net: CAN1. CAN2. CAN3. CAN4. DCDC1.2@5729.5,3307.46 ICM1.7 IDLE1.GND KEY.3 P10.GND RADIO1.GND RST. SWD1.1. SWD1.A U1.2 U1.50 U3.5 U4.5 USB_L1.1. USB_L1.A
copper on no net:
  other v2: 3625,2680 3625,2680 5910,2680 5910,2680 3625,4610 5910,4610

## Polygon pours and split planes (outlines as drawn)
GND on Top Layer "Top Layer-No Net" (solid, remove dead copper, pour order 1000): 3357.32,4917.17 3357.32,2258.73 3362.32,2252.17 3482.32,2409.7 6222.32,2409.7 6222.32,4707.12 6067.32,4910.6
GND on Bottom Layer "Top Layer-No Net" (solid, remove dead copper, pour order 1001): 3466.06,4920.27 3416.06,4854.5 3416.06,2447.24 6066.06,2447.24 6096.06,2486.7 6186.06,2605.09 6186.06,4940

## Keep-outs
Keep-Out Layer:
  lines w10: 3484.92,4644.04 cw(c3592.94,4641.98) 3595,4750 5945,4749.92 ; 5945,4750 cw(c5942.94,4641.98) 6050.96,4639.92
  lines w17.87: 3487.2,2660 3487.2,4644.04 ; 3487.2,2680 ccw(c3625,2680) 3625,2542.2 ; 3630,2540 5925.98,2540 ; 5915,2540 ccw(c5915,2677.8) 6052.8,2677.8 ; 6051.26,2675 6051.26,4639.92

## Silkscreen, mask and mechanical layers (free items; w line width, h text height)
Top Overlay:
  circle w10: c5060,3780 r18.03
  rectangle: 4177.02,2669.04 4502.02,2679.04
  region: 4171.85,2636.54 4146.85,2636.54 4146.85,2611.54 4171.85,2611.54
  region: 4202.02,2679.04 4181.54,2693.38 4160.16,2662.83 4180.64,2648.49
  rectangle: 4225,2680 4250,2705
  rectangle: 5825,2890 6045,2965
  lines w10: 4900,3765 4885,3780 ; 4900,3795 4885,3780 ; 5045,3920 5060,3935 ; 5075,3920 5060,3935 ; 5830,2950 5830,3195 5850,3215 6040,3215 ; 4885,3780 5060,3780 5060,3935 ; 3860,3970 3860,4080 3885,4105 4215,4105 4220,4100 4220,3975 4210,3965 3865,3965 3860,3970 ; 4270,3970 4275,3965 4620,3965 4630,3975 4630,4100 4625,4105 4295,4105 4270,4080 4270,3970
  lines w20: 4172.02,2619.04 cw(c4240,2616.99) 4240,2685
  text "LHG+" at 3835,4400 h60 r90
  text "LHG+" at 5760,4355 h60 r90
  text "-+CD" at 5755,4315 h60 r270
  text "S + G" at 3975,4125 h60
  text "S + G" at 4395,4125 h60
  text "-+PM" at 5758.78,3963.78 h60 r270
  text "DJ" at 3785,3900 h80
  text "Y" at 5100,3890 h60
  text "X" at 4920,3800 h60
  text "BA-" at 3810,3650 h60 r90
  text "9~36V" at 5675,2830 h60
  text "BAT+" at 5860,2830 h60
  text "G CL SO SI" at 4530,2785 h60
  text "+GTR" at 3785,2705 h60 r90
  text "Tinymal" at 4210,2575 h140
  text "V2.0" at 4725,2575 h60
  text "5V" at 5755,2560 h60
Bottom Overlay:
  text "485" at 3575,3715 h80 r90

## Text inside footprints (layer, text, board x,y; h text height)
BEEP?: Top Overlay "+" at 4579,3796 h40 r180
PIO: Top Overlay "13" at 3980,3540 h50 r90; Top Overlay "14" at 3880,3540 h50 r90; Top Overlay "1" at 3980,2740 h50 r90; Top Overlay "2" at 3880,2740 h50 r90